# Altium PCB extern.PcbDoc
Units mil, origin at the board's own origin, x right, y up, seen from the top; angles counter-clockwise.
Board outline 1040 x 1150 mil, 2 copper layers (Top Layer, Bottom Layer); 4 components, 10 nets, 27 pads, 0 vias.
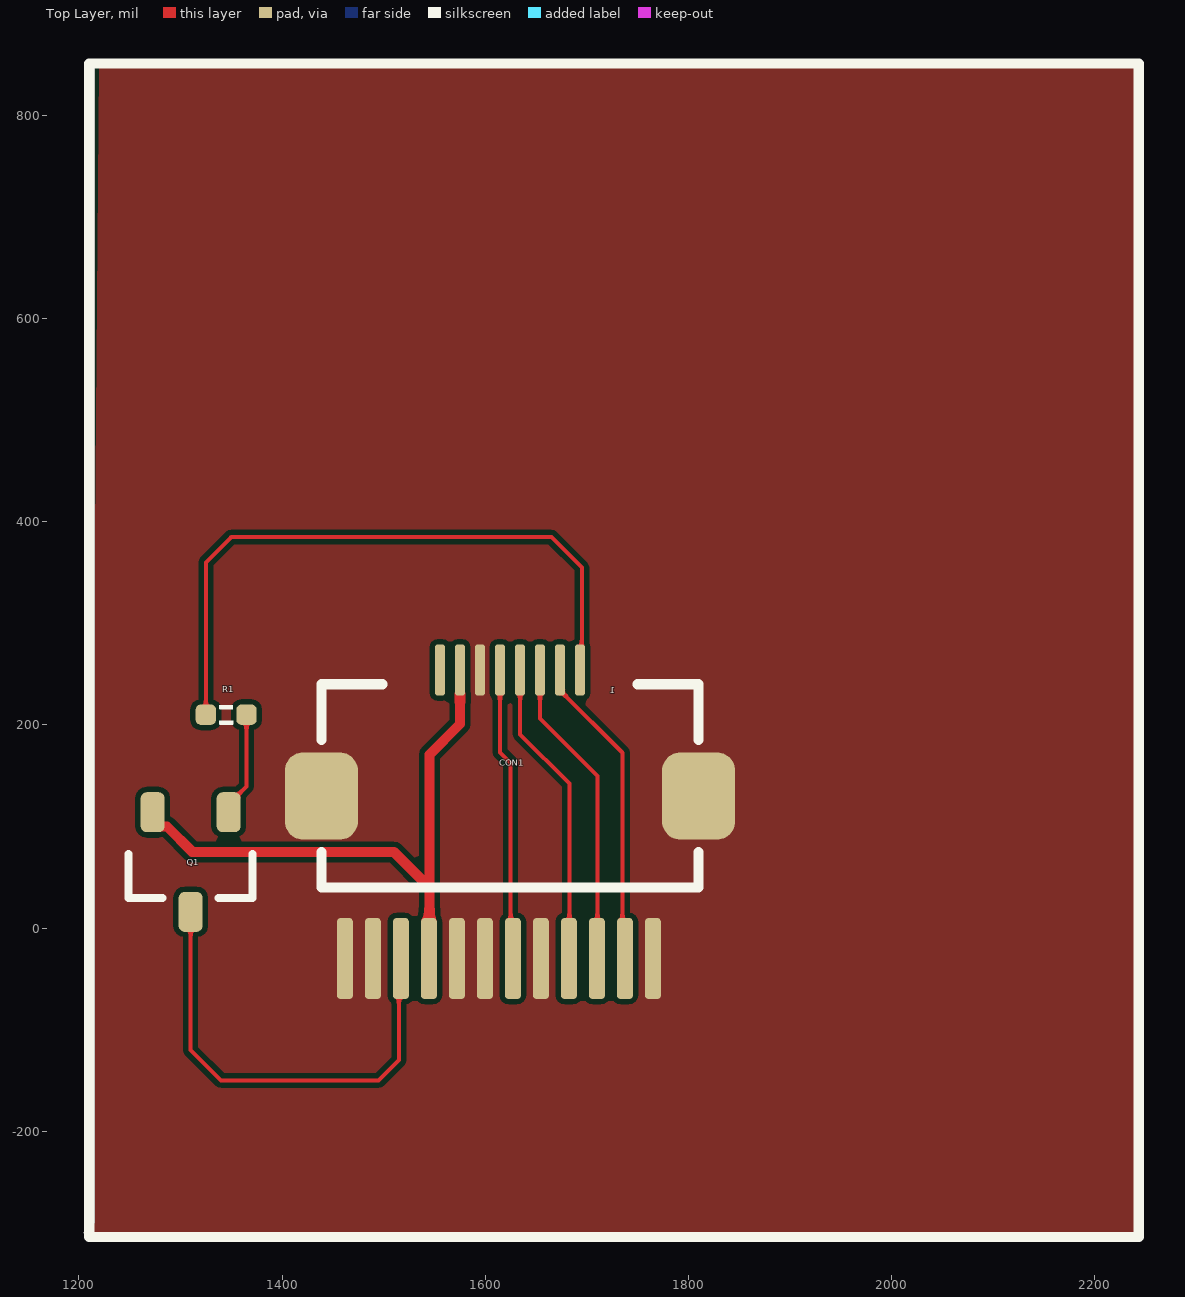
[diagram p0: Top Layer view]
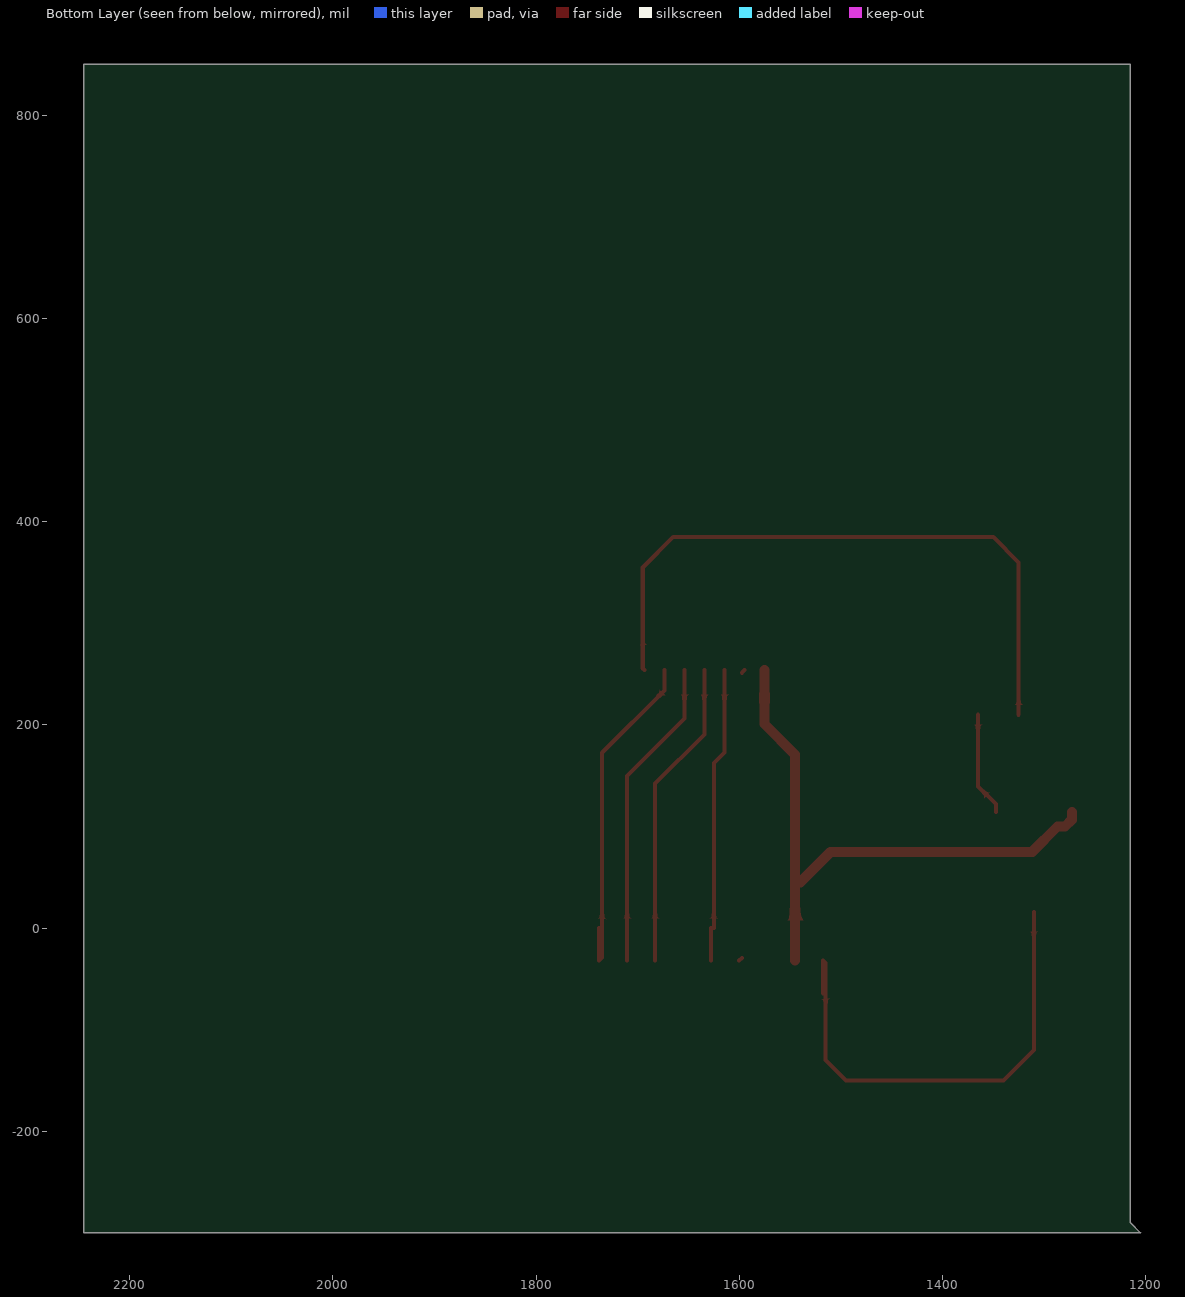
[diagram p1: Bottom Layer view, seen from below]
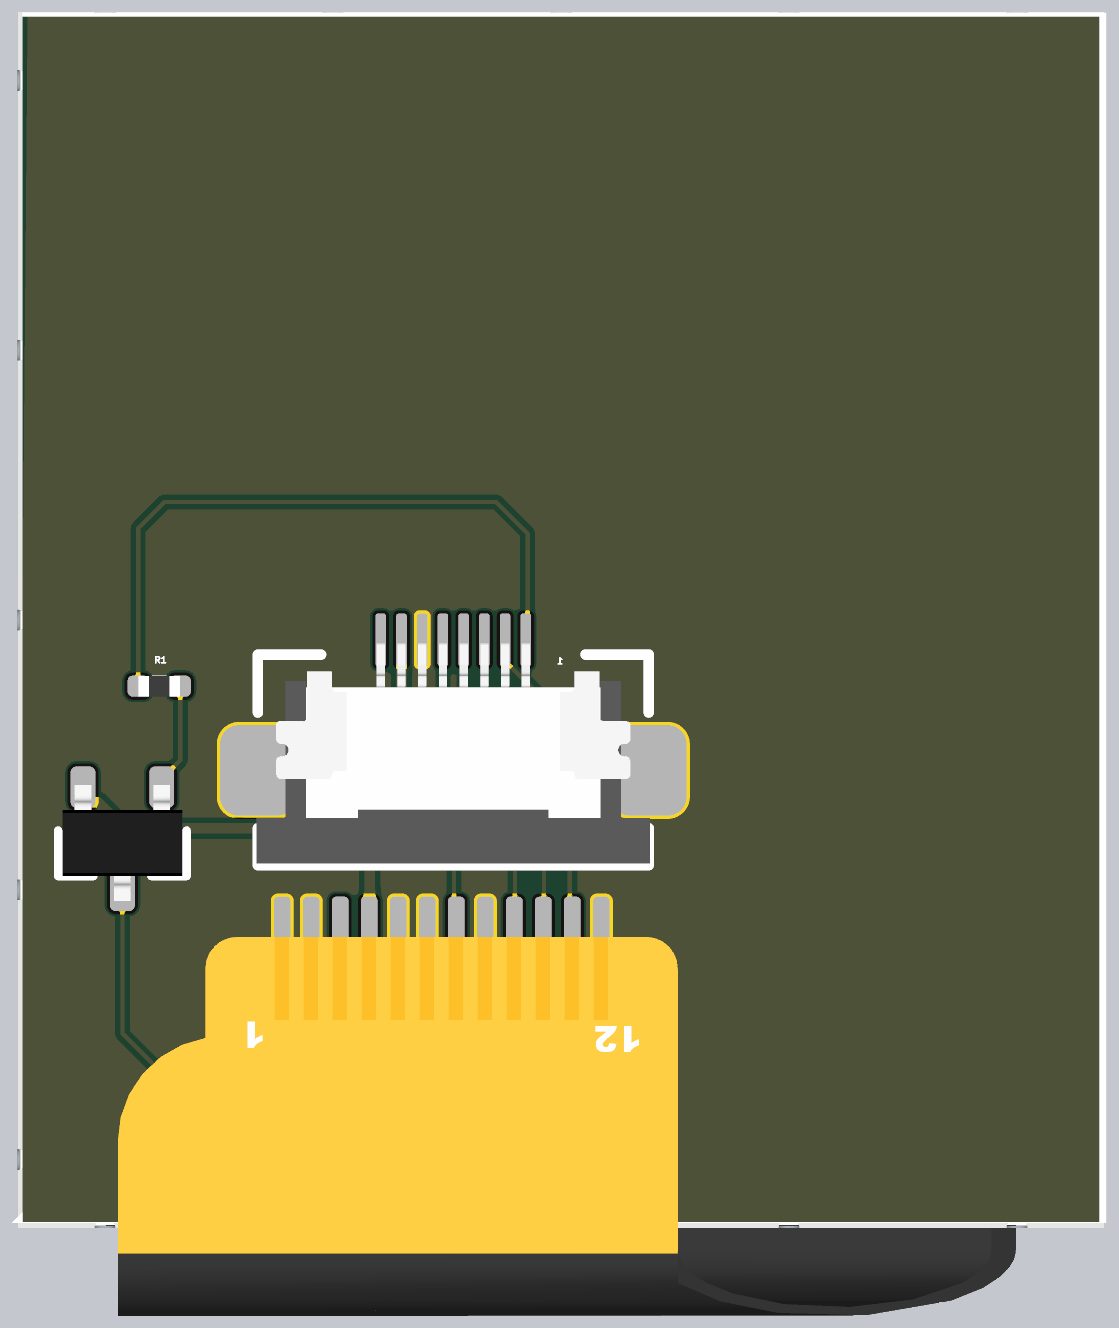
[diagram p2: 3D render of the assembled board from above, using the file's embedded part models]

## Layer stack, top to bottom
Top Solder: solder mask 0.4, Solder Resist, Dk 3.5
Top Layer: signal copper 1.4
Dielectric 1: dielectric 12.6, FR-4, Dk 4.8
Bottom Layer: signal copper 1.4
Bottom Solder: solder mask 0.4, Solder Resist, Dk 3.5

## Board outline
1205,-300 2245,-300 2245,850 1215,850 1215,-290

## Design rules (kind name [scope] priority, off if disabled: settings)
Clearance [All] p1: gap=5 ignorepadtopadclearanceinfootprint=FALSE
MinimumSolderMaskSliver [All] p1: minsoldermaskwidth=2
PlaneClearance [All] p1: clearance=8
PlaneConnect [All] p1: planeconnectstyle=Direct reliefexpansion=20 reliefentries=4 reliefconductorwidth=10 reliefairgap=10
PolygonConnect [All] p1: connectstyle=Direct reliefconductorwidth=10 reliefentries=4 polygonreliefangle="90 Angle" airgapwidth=10
RoutingVias [All] p1: holewidth=28 width=50 viastyle="Through Hole" minholewidth=28 minwidth=50 maxholewidth=28 maxwidth=50
SilkToSolderMaskClearance [IsPad] p1: minsilkscreentomaskgap=1 clearancetoexposedcopper=TRUE
SolderMaskExpansion [All] p1: expansion=3 istentingtop=FALSE
Width [All] p1: maxlimit=10 minlimit=4 preferedwidth=4
26 further rules are at their usual default settings.

## Classes and differential pairs
component class extend: CON1 Q1 R1

## Components (designator, comment, footprint, x,y, rotation, side; value= is the part's Value field where it differs from the comment)
1 "LCD-240x240" LCD-240x240-NoHole 1743.85,177 r180 bottom
CON1 "FFC_0.5_8" FFC_0.5_8 1624.37,165 r0 top
Q1 "AO3415A" SOT23-3 1310,65 r270 top
R1 "1K" RES_0402 1345,210 r0 top value=22R

## Footprints (in the part's own frame and the unit in brackets; to place one, negate y for a bottom-side part, rotate by r counter-clockwise, add the part's x,y. Pads: shape width x height; smd on the part's side, far side on the other; paste and mask are expansions set on the pad)
FFC_0.5_8 [mil]
  rrect50% 72x86 smd: 0(-185.63,-35) 0(185.63,-35)
  rrect50% 10x50 smd: 1(-68.9,89) 2(-49.21,89) 3(-29.53,89) 4(-9.84,89) 5(9.84,89) 6(29.53,89) 7(49.21,89) 8(68.9,89)
  silkscreen extent -186,-125 186,75, body extent -187,-124 187,87, height 82
LCD-240x240-NoHole [mil]
  rrect50% 15.75x80 smd far side: 1(282,-207) 2(254.44,-207) 3(226.88,-207) 4(199.32,-207) 5(171.76,-207) 6(144.2,-207) 7(116.65,-207) 8(89.09,-207) 9(61.53,-207) 10(33.97,-207) 11(6.41,-207) 12(-21.15,-207)
  body extent -499,-565 534,673, height 20
RES_0402 [mil]
  rrect50% 20x20 smd: 1(-20,0) 2(20,0)
  silkscreen extent -6,-10 6,10, body extent -20,-10 20,10, height 14
SOT23-3 [mm] "SOT23, 3-Leads, Body 3.1x3.0mm (max), Pitch 0.95mm, IPC Medium Density"
  rrect50% 1x0.6 smd: 1(-1.246,0.95) 2(-1.246,-0.95) 3(1.246,0)
  silkscreen extent -0.2,-1.55 0.9,1.55, body extent -1.3,-1.45 1.5,1.45, height 1.2

## Part data
1: "显示屏"
CON1: "FFC", System=Connector
Q1: "MOSFET", LatestRevisionDate=17-Jul-2002, LatestRevisionNote="Re-released for DXP Platform.", PackageDescription="TO, Flat Index; 3 In-Line, Axial Leads; Body Dia. 4.6mm; Lead Dia. 0.5 mm (max)", PackageReference=E3, PackageVersion=1995/1996, Published=8-Jun-2000, Publisher="Altium Limited"
R1: library part 电阻-0402, "Resistor"

## Nets (pads, with @x,y where several pads share a name; then routed paths per layer and width w, separated by ;. In a path a pad name is that pad's centre, name@x,y a point inside that pad or via, vN(x,y) a via of type N, cw(c..) or ccw(c..) an arc to the next point about the centre after c; other vN are vias at no path point)
3V3: 1.4 CON1.2 Q1.2 | length 598.8
  Top Layer w10: Q1.2 1272.6,106.67 1279.34,99.93 1286.72,99.93 1311.65,75 1510,75 1540,45 ; 1545,45 1545.07,45.07 1545.07,170.75 1575.16,200.84 CON1.2 ; 1.4@1545.07,-32 1545.07,45
DC: 1.7 CON1.4 | length 290.3
  Top Layer w4: CON1.4 1614.53,172.96 1625,162.49 1.7@1625,0 ; 1.7@1627.75,-32 1.7@1627.75,0
GND: 1.1 1.2 1.5 1.6 1.8 1.12 CON1.0 CON1.3 | length 7.6
  Top Layer w4: CON1.3 CON1.3@1597.52,251.33 ; 1.6@1597.52,-29.33 1.6@1600.19,-32
LCD_BL: CON1.8 R1.1 | length 644.5
  Top Layer w4: R1.1 1325,360 1350,385 1665,385 1695,355 1695,255.73 CON1.8
"LDC BL VCC": 1.3 Q1.3 | length 492.8
  Top Layer w4: Q1.3 1310,-120 1340,-150 1495,-150 1515,-130 1515,-34.51 1517.51,-32 1.3@1517.51,-64.13
MOSI: 1.10 CON1.6 | length 309.4
  Top Layer w4: CON1.6 1653.9,206.1 1710.43,149.57 1.10@1710.43,-32
NetQ1_1: Q1.1 R1.2 | length 103.2
  Top Layer w4: Q1.1 1347.4,121.93 1365,139.53 R1.2
RES: 1.11 CON1.7 | length 344.8
  Top Layer w4: CON1.7 1673.58,234 1735,172.58 1735,-29.02 1737.98,-32 1.11@1737.98,0.13
SCK: 1.9 CON1.5 | length 305.9
  Top Layer w4: CON1.5@1634.38,253.83 1634.38,190.62 1682.87,142.13 1.9@1682.87,-32
VDD_5V: CON1.1

## Polygon pours and split planes (outlines as drawn)
GND on Top Layer "GND_L01_P000" (solid, remove dead copper, pour order 0): 1220,847.5 1225,852.5 2240,852.5 2240,-302.5 1210,-302.5

## Silkscreen, mask and mechanical layers (free items; w line width, h text height)
Mechanical 1:
  lines w10: 1210,850 1215,850 1215,-290 1205,-300 2245,-300 2245,850 1212.5,850